# Altium PCB Module_AFE_FPC.PcbDoc
Units mil, origin at the board's own origin, x right, y up, seen from the top; angles counter-clockwise.
Board outline 1200 x 1200 mil, 4 copper layers (Top Layer, Layer 1, Layer 2, Bottom Layer), stack 29.356 mil thick; 18 components, 34 nets, 162 pads, 13 vias.
Unrouted connection lines stored in the file: 2.
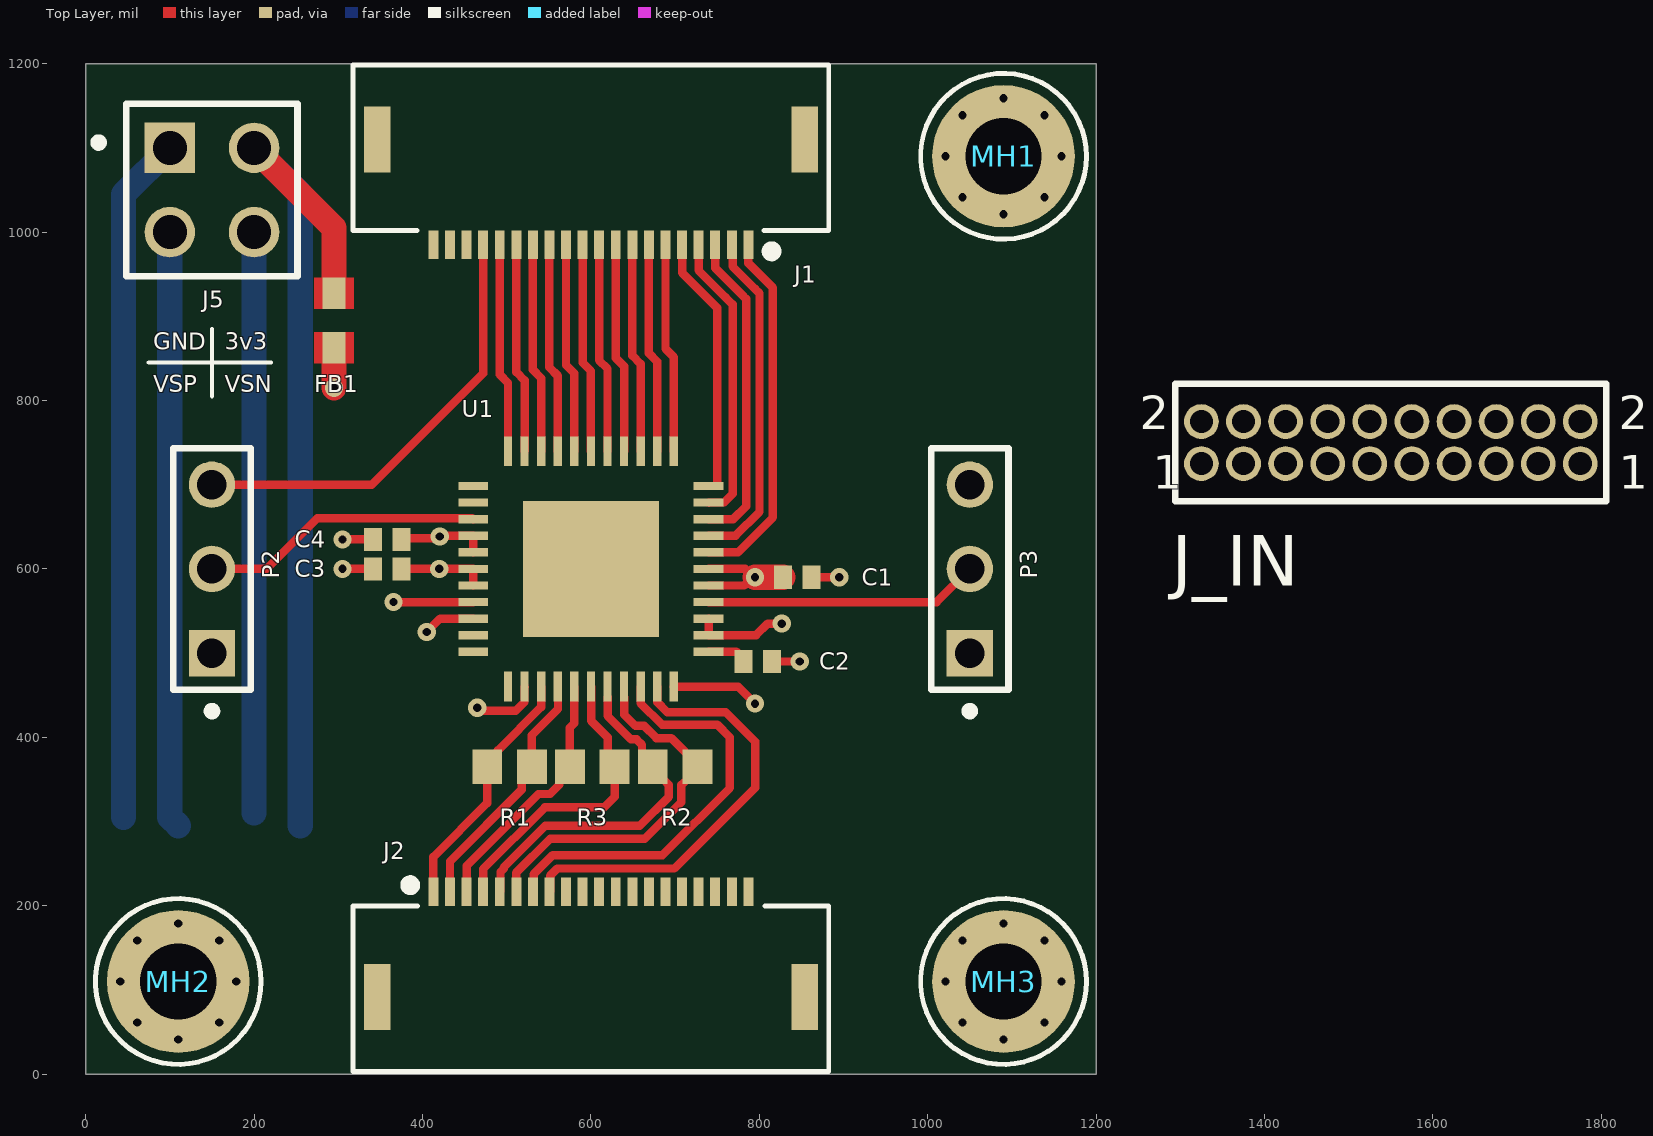
[diagram p0: Top Layer view]
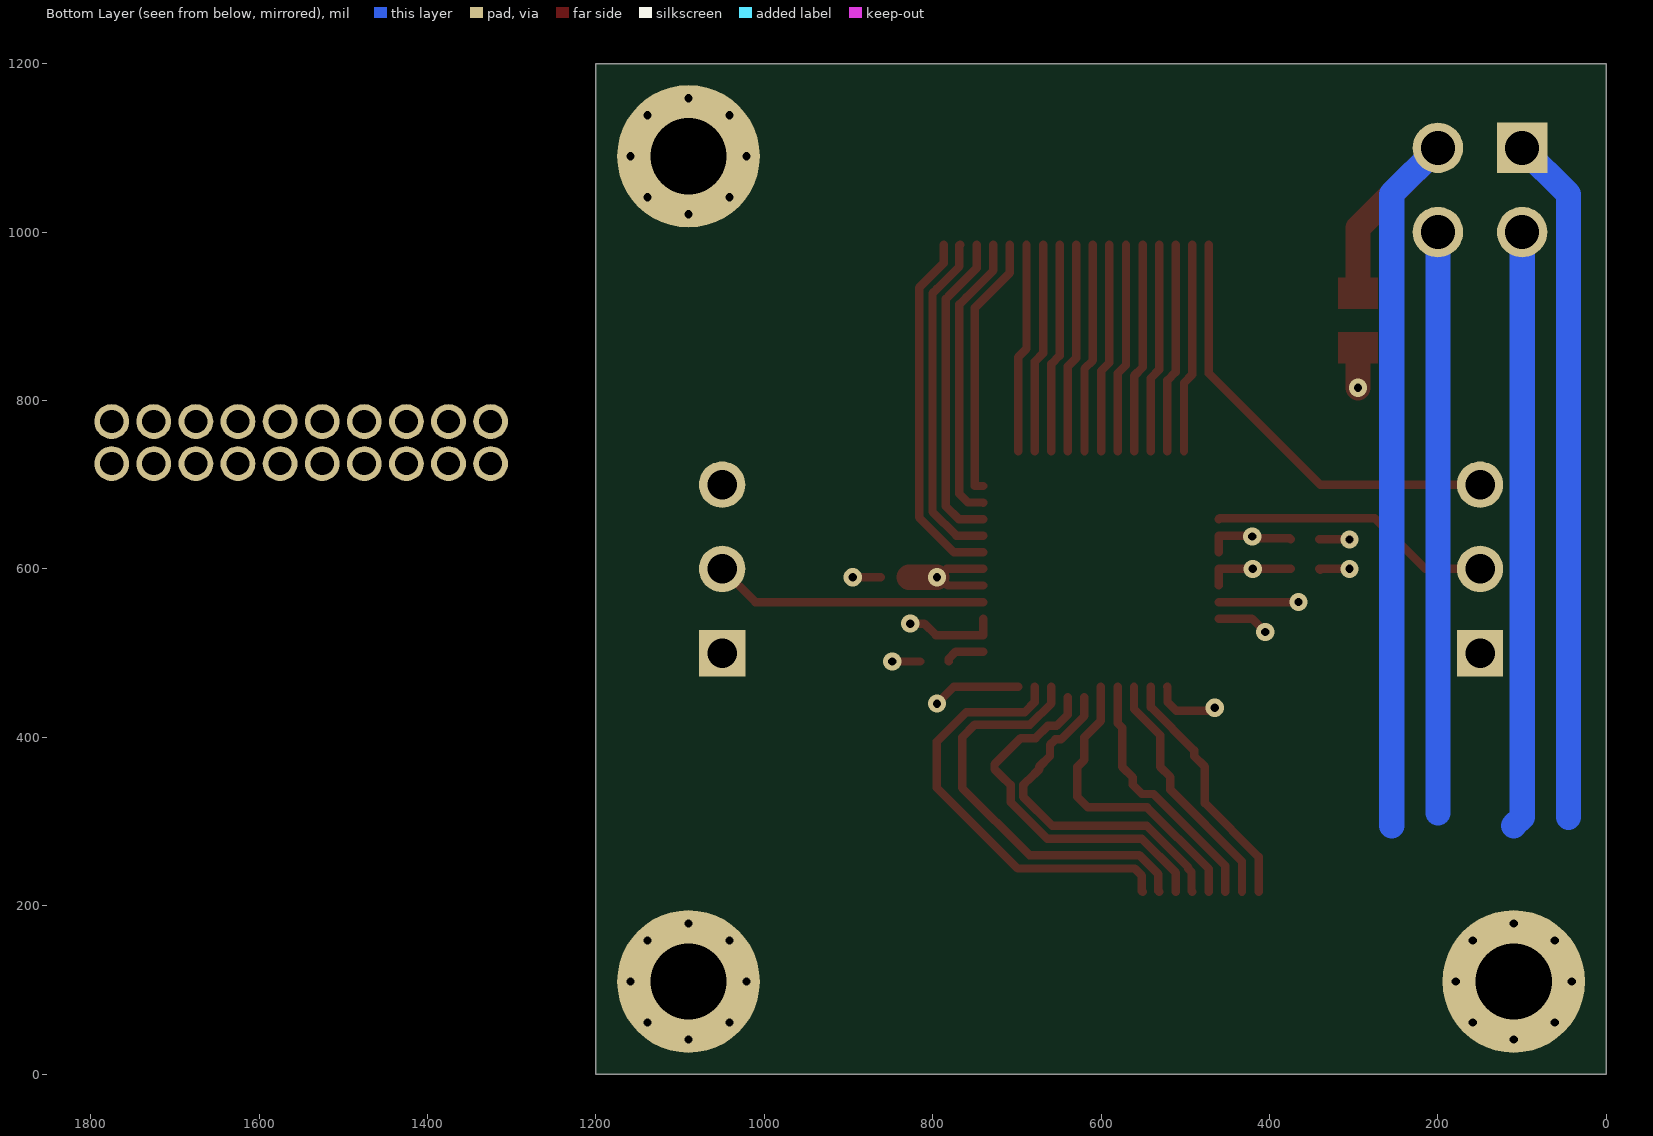
[diagram p1: Bottom Layer view, seen from below]
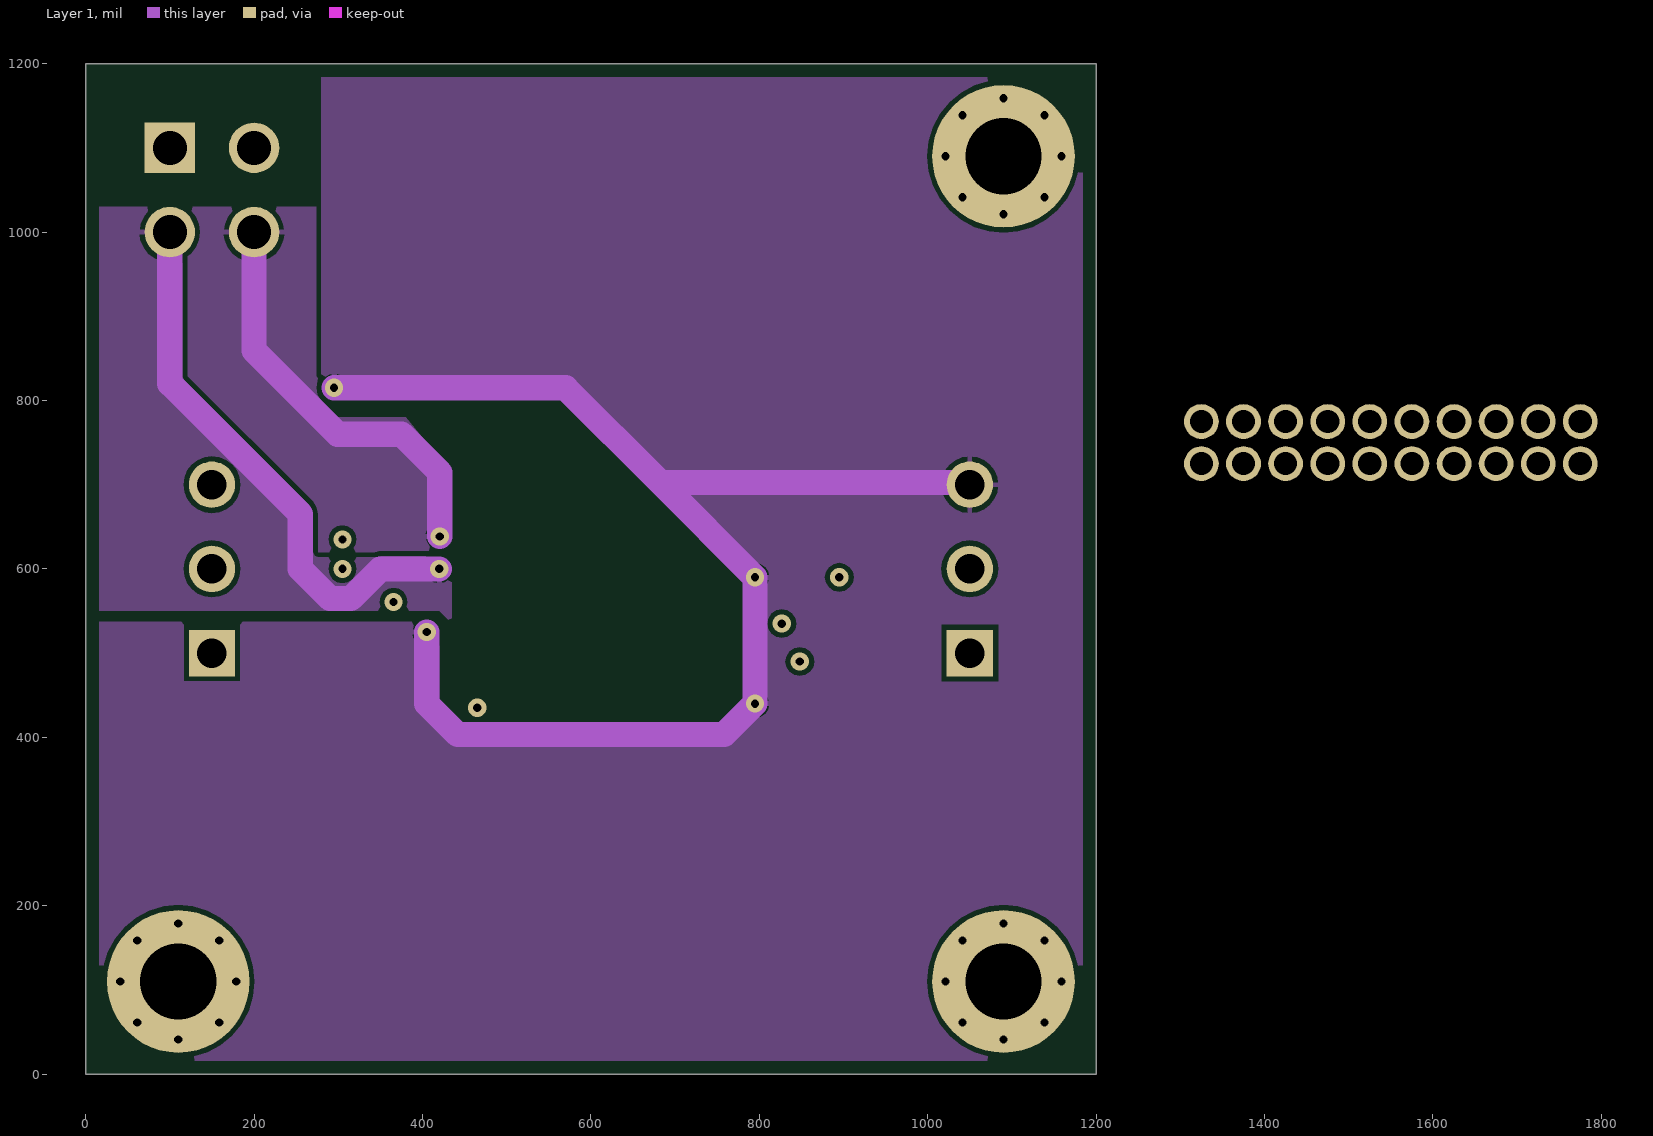
[diagram p2: Layer 1]
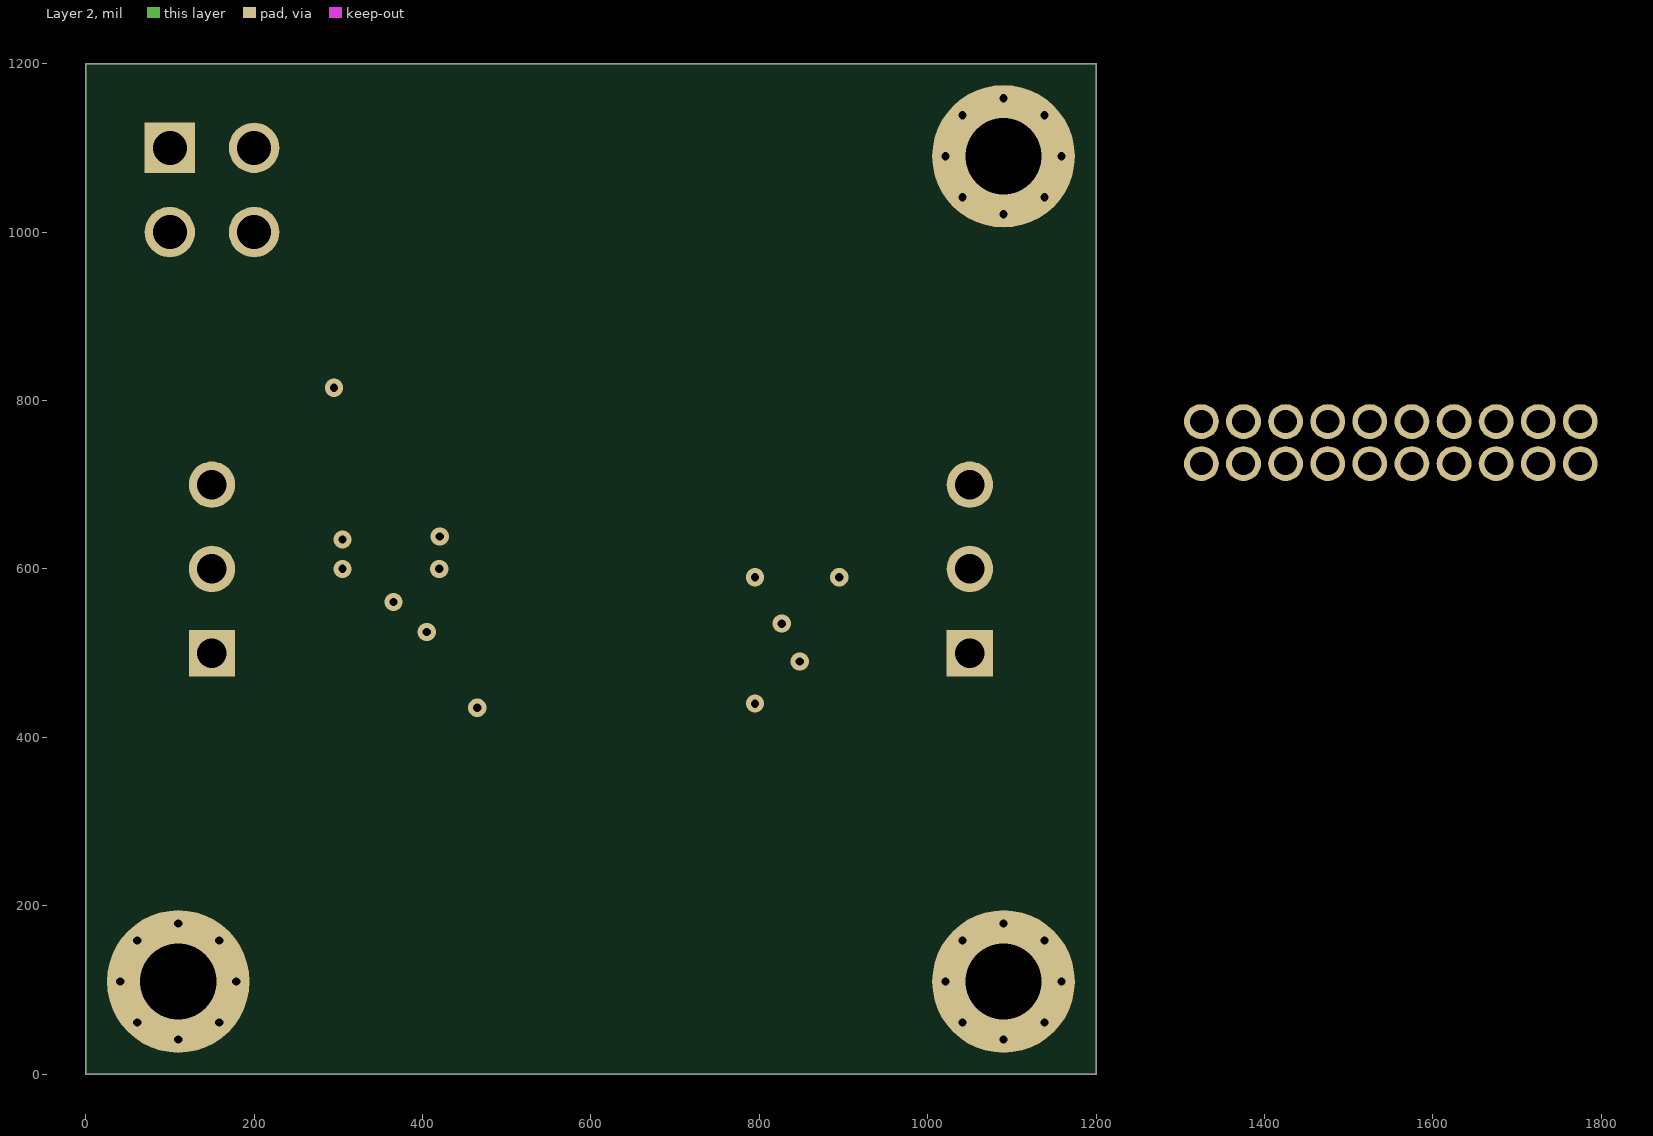
[diagram p3: Layer 2]

## Layer stack, top to bottom
Top Solder: solder mask 0.4, Solder Resist, Dk 3.5
Top Layer: signal copper 1.4
Dielectric 4: prepreg 2.8, PP-006, Dk 4.1
Layer 1: signal copper 1.378
Dielectric 2: prepreg 2.8, PP-006, Dk 4.1
Dielectric 1: dielectric 12.6, FR-4, Dk 4.8
Dielectric 3: prepreg 2.8, PP-006, Dk 4.1
Layer 2: signal copper 1.378
Dielectric 5: prepreg 2.8, PP-006, Dk 4.1
Bottom Layer: signal copper 1.4
Bottom Solder: solder mask 0.4, Solder Resist, Dk 3.5

## Board outline
0,0 1200,0 1200,1200 0,1200

## Design rules (kind name [scope] priority, off if disabled: settings)
BoardOutlineClearance [All] p1: gap=15.75 ignorepadtopadclearanceinfootprint=FALSE
Clearance [All] p1: gap=5.91 ignorepadtopadclearanceinfootprint=TRUE
ComponentClearance [All] p1: gap=5.91 collisioncheckmode=3 verticalgap=5.91 showdistances=FALSE
DiffPairsRouting [All] p1: maxlimit=10 minlimit=5 mostfreqgap=10 toplayer_minwidth=10 toplayer_maxwidth=15 toplayer_prefwidth=15 midlayer1_minwidth=15 midlayer1_maxwidth=15 midlayer1_prefwidth=15 midlayer2_minwidth=15 midlayer2_maxwidth=15 midlayer2_prefwidth=15 bottomlayer_minwidth=10 bottomlayer_maxwidth=15 bottomlayer_prefwidth=15 maxuncoupledlength=500
HoleSize [All] p1: absolutevalues=TRUE maxlimit=15.75 minlimit=9.84 maxpercent=80.000 minpercent=20.000
HoleToHoleClearance [All] p1: gap=17.72 allowstackedmicrovias=TRUE
MinimumAnnularRing [All] p1: minimumring=5.91
MinimumSolderMaskSliver [All] p1: minsoldermaskwidth=5.91
PlaneClearance [All] p1: clearance=5.91
PlaneConnect [All] p1: planeconnectstyle=Relief reliefexpansion=9.84 reliefentries=4 reliefconductorwidth=5.91 reliefairgap=5.91
PolygonConnect [All] p1: connectstyle=Relief reliefconductorwidth=5.91 reliefentries=4 polygonreliefangle="90 Angle" airgapwidth=5.91
RoomDefinition Module_AFE [InComponentClass('Module_AFE')] p1: confinementstyle=ConfineIn formatcopy=TRUE lockcomponents=FALSE outline 1245,-45 2910,-45 2910,645 1245,645
RoomDefinition U_intanRHS2116 [InComponentClass('U_intanRHS2116')] p2 off: confinementstyle=ConfineIn formatcopy=TRUE lockcomponents=FALSE outline 0,0 2000,0 2000,1320 0,1320
RoutingVias [All] p1: holewidth=9.84 width=21.65 viastyle="Through Hole" minholewidth=9.84 minwidth=21.65 maxholewidth=15.75 maxwidth=31.5
SilkToSilkClearance [All] p1: silktosilkclearance=7.87
SilkToSolderMaskClearance [IsPad] p1: minsilkscreentomaskgap=7.87 clearancetoexposedcopper=TRUE
SolderMaskExpansion [All] p1: expansion=5.91 istentingtop=FALSE
Width [All] p1: maxlimit=1968.5 minlimit=5.91 preferedwidth=5.91
21 further rules are at their usual default settings.

## Classes and differential pairs
net class ELEC[0..15]: ELEC0 ELEC1 ELEC2 ELEC3 ELEC4 ELEC5 ELEC6 ELEC7 ELEC8 ELEC9 ELEC10 ELEC11 ELEC12 ELEC13 ELEC14 ELEC15
component class U_intanRHS2116: C1 C2 C3 C4 U1
component class Module_AFE: FB1 J1 J2 J5 J_IN MH1 MH2 MH3 P2 P3 R1 R2 R3
differential pair SCLK1h: +SCLK1h_P -SCLK1h_N
differential pair nCS1h: +nCS1h_P -nCS1h_N
differential pair MOSI1h: +MOSI1h_P -MOSI1h_N
differential pair MISO1h: +MISO1h_P -MISO1h_N

## Components (designator, comment, footprint, x,y, rotation, side; value= is the part's Value field where it differs from the comment)
C1 "capacitor_npol_ame" rcl_0402i_1005m_most 845,590 r180 top value=100nF
C2 "capacitor_npol_ame" rcl_0402i_1005m_most 798.07,490 r180 top value=10nF
C3 "capacitor_npol_ame" rcl_0402i_1005m_most 358.07,600 r0 top value=100nF
C4 "capacitor_npol_ame" rcl_0402i_1005m_most 358.07,635 r0 top value=100nF
FB1 "BLM18PG121SN1D" MURA-BLM18PG_KG-B25-CHIP-2_V1 295,895 r270 top
J1 "FH52-20S-0.5SH" FH52-20S-0.5SH 600,1110 r180 top
J2 "FH52-20S-0.5SH" FH52-20S-0.5SH 600,91.54 r0 top
J5 "HTSW-102-07-G-D" FP-HTSW-102-07-G-D-MFG 150,1050 r270 top
J_IN "62202021121" 62202021121 1550,750 r0 top
MH1 "MH_7.4MMC_3.2MMD" M2X0.4_plated_loose_fit_pan_head 1090,1090 r0 top
MH2 "MH_7.4MMC_3.2MMD" M2X0.4_plated_loose_fit_pan_head 110,110 r0 top
MH3 "MH_7.4MMC_3.2MMD" M2X0.4_plated_loose_fit_pan_head 1090,110 r0 top
P2 "87224-3" TECO-87224-3_V 150,600 r90 top
P3 "87224-3" TECO-87224-3_V 1050,600 r90 top
R1 "CRCW0603100RJNEA" RESC1609X50X30ML10T20 503.43,365 r0 top
R2 "CRCW0603100RJNEA" RESC1609X50X30ML10T20 700,365 r0 top
R3 "CRCW0603100RJNEA" RESC1609X50X30ML10T20 601.57,365 r0 top
U1 "Intan Technologies RHS2116 chip" QFN44_7_X_7 600,600 r0 top

## Footprints (in the part's own frame and the unit in brackets; to place one, negate y for a bottom-side part, rotate by r counter-clockwise, add the part's x,y. Pads: shape width x height; smd on the part's side, far side on the other; paste and mask are expansions set on the pad)
62202021121 [mm] "Pin Header, pitch 1.27 mm, THT, Vertical, dual row, 20p"
  round 1.05 hole 0.7: 1(-5.715,-0.635) 2(-5.715,0.635) 3(-4.445,-0.635) 4(-4.445,0.635) 5(-3.175,-0.635) 6(-3.175,0.635) 7(-1.905,-0.635) 8(-1.905,0.635) 9(-0.635,-0.635) 10(-0.635,0.635) 11(0.635,-0.635) 12(0.635,0.635) 13(1.905,-0.635) 14(1.905,0.635) 15(3.175,-0.635) 16(3.175,0.635) 17(4.445,-0.635) 18(4.445,0.635) 19(5.715,-0.635) 20(5.715,0.635)
  silkscreen extent -6.5,-1.78 6.5,1.78, body extent -6.35,-1.7 6.35,1.7, height 5.33
FH52-20S-0.5SH [mm] "FPC Connector; FH52 Series; 20 Position; 0.5mm pitch; Right Angle"
  rect 0.3x0.85 smd: 1(-4.75,3.175) 2(-4.25,3.175) 3(-3.75,3.175) 4(-3.25,3.175) 5(-2.75,3.175) 6(-2.25,3.175) 7(-1.75,3.175) 8(-1.25,3.175) 9(-0.75,3.175) 10(-0.25,3.175) 11(0.25,3.175) 12(0.75,3.175) 13(1.25,3.175) 14(1.75,3.175) 15(2.25,3.175) 16(2.75,3.175) 17(3.25,3.175) 18(3.75,3.175) 19(4.25,3.175) 20(4.75,3.175)
  rect 0.8x2 smd: MP1(-6.45,0) MP2(6.45,0)
  silkscreen extent -7.17,-2.25 7.17,3.52, body extent -7.15,-2.25 7.15,3.45, height 2
FP-HTSW-102-07-G-D-MFG [mm]
  rect 1.52x1.52 hole 1.02 paste-1000 mask+0: 1(-1.27,-1.27)
  round 1.52 hole 1.02 paste-1000 mask+0: 2(-1.27,1.27) 3(1.27,-1.27) 4(1.27,1.27)
  silkscreen extent -2.6,-3.54 2.6,2.58, body extent -2.7,-2.68 2.7,2.68, height 0.25
M2X0.4_plated_loose_fit_pan_head [mm] "Loose fit, plated land pattern for metric M2 (2mm radius) screw by 0.4mm length screw with pan head direct mounting"
  round 0.55 hole 0.25 mask+0: 1(-1.75,0) 1(-1.237,-1.237) 1(-1.237,1.237) 1(0,-1.75) 1(0,1.75) 1(1.237,-1.237) 1(1.237,1.237) 1(1.75,0)
  round 4.3 hole 2.3: 1(0,0)
  silkscreen extent -2.5,-2.5 2.5,2.5
MURA-BLM18PG_KG-B25-CHIP-2_V1 [mm] "Chip Ferrite Bead, 2-Leads, Body 1.6x0.8mm, Pitch 1.65mm, Flow Soldering, 18um Land Pad Thickness"
  rect 0.95x0.7 smd mask+0: 1(-0.825,0) 2(0.825,0)
  Top Layer region: -1.3,-0.6 -0.35,-0.6 -0.35,0.6 -1.3,0.6
  Top Layer region: 0.35,-0.6 1.3,-0.6 1.3,0.6 0.35,0.6
  body extent -0.87,-0.48 0.88,0.48, height 0.95
QFN44_7_X_7 [mm]
  rect 0.9x0.25 smd: 1(-3.55,2.5) 2(-3.55,2) 3(-3.55,1.5) 4(-3.55,1) 5(-3.55,0.5) 6(-3.55,0) 7(-3.55,-0.5) 8(-3.55,-1) 9(-3.55,-1.5) 10(-3.55,-2) 11(-3.55,-2.5) 23(3.55,-2.5) 24(3.55,-2) 25(3.55,-1.5) 26(3.55,-1) 27(3.55,-0.5) 28(3.55,0) 29(3.55,0.5) 30(3.55,1) 31(3.55,1.5) 32(3.55,2) 33(3.55,2.5)
  rect 0.25x0.9 smd: 12(-2.5,-3.55) 13(-2,-3.55) 14(-1.5,-3.55) 15(-1,-3.55) 16(-0.5,-3.55) 17(0,-3.55) 18(0.5,-3.55) 19(1,-3.55) 20(1.5,-3.55) 21(2,-3.55) 22(2.5,-3.55) 34(2.5,3.55) 35(2,3.55) 36(1.5,3.55) 37(1,3.55) 38(0.5,3.55) 39(0,3.55) 40(-0.5,3.55) 41(-1,3.55) 42(-1.5,3.55) 43(-2,3.55) 44(-2.5,3.55)
  rect 4.1x4.1 smd: CENTER(0,0)
rcl_0402i_1005m_most [mm] "Chip RCL, 0402 Imperial, 1005 Metric, 2-Leads, Body 1.00x0.5mm, IPC Most Land (Low Density)"
  rect 0.54x0.7 smd: 1(-0.43,0) 2(0.43,0)
  body extent -0.5,-0.25 0.5,0.25, height 0.5
RESC1609X50X30ML10T20 [mm] "Chip Resistor, 2-Leads, Body 1.55x0.85mm, IPC Low Density"
  rect 0.9x1.05 smd: 1(-0.675,0) 2(0.675,0)
  body extent -0.82,-0.48 0.82,0.48, height 0.5
TECO-87224-3_V [mm] "THD, 3-Leads, Body 7.21x2.31mm, Pitch 2.54mm"
  rect 1.4x1.4 hole 0.889: 1(-2.54,0)
  round 1.4 hole 0.889: 2(0,0) 3(2.54,0)
  silkscreen extent -4.41,-1.17 3.64,1.17, body extent -3.61,-1.17 3.61,1.17, height 10.36

## Part data
C1 C3 C4: "Capacitor Non-polarized American Symbol", Manufacturer=Yageo, Manuracturer Part Number=CC0402KRX7R8BB104, Package=0402, Supplier Part Number 1=311-2077-1-ND, Voltage Rating=25V, ComponentLink1Description=Datasheet, ComponentLink1URL=http://www.yageo.com/documents/recent/UPY-GPHC_X7R_6.3V-to-50V_18.pdf, Priging 1="1 	0.15000 	$0.15 (CAD)", Stock 1=143,749, Supplier 1=Digikey, Supplier Description 1="CAP CER 0.1UF 25V X7R 0402", Supplier Link 1=https://www.digikey.ca/product-detail/en/yageo/CC0402KRX7R8BB104/311-2077-1-ND/5698948
C2: "Capacitor Non-polarized American Symbol", Case Code=0402, Manufacturer="Murata Electronics North America", Manufacturer Part Number=GRM155R71H103KA88D, Tolerance=10%, Voltage Rating=25V, ComponentLink1Description="Reference Sheet", ComponentLink1URL=https://www.murata.com/~/media/webrenewal/support/library/catalog/products/capacitor/mlcc/c02e.ashx?la=en-us, Pricing 1=Free, Stock 1=8970712, Supplier 1=7PCB/Bittele, Supplier Description 1="CAP CER 0.01uF ±10% 50V X7R 0402", Supplier Link 1=https://parts.7pcb.com/, Supplier Part Number 1=GRM155R71H103KA88D
FB1: library part CMP-0686-00557-6, "Chip Ferrite Bead for Power Lines, 120 Ohm, 2000 mA, -55 to 125 degC, 1.6 x 0.8 x 0.95 mm SMD, Tape and Reel", DC Resistance="0.05 Ohm Max.", Manufacturer=Murata, Operating Temperature Range="-55 to 125 degC", Rated Current="2000 mA", ComponentLink1Description="Manufacturer URL", ComponentLink1URL=http://www.murata.com/, ComponentLink2Description=Datasheet, ComponentLink2URL=http://www.murata.com/products/catalog/pdf/c31e.pdf, ComponentLink3Description="Package Specification", ComponentLink3URL=http://www.murata.com/products/catalog/pdf/c31e.pdf, DatasheetVersion=08/2013, Impedance (at 100 MHz)="120 Ohm +/- 25%", Mounting Technology="Surface Mount", PackageDescription="2-Pin Chip, Body 1.6 x 0.8 mm", PackageReference=BLM18_H950-2, Packing="Tape and Reel", PartNumber=BLM18PG121SN1D
J1 J2: "01X20 Terminal Connector with  2 mount ground pads", Manufacturer=Hirose, Manufacturer PN=FH52-20S-0.5SH
J5: library part CMP-02766-000010-1, "CONN HEADER VERT 4POS 2.54MM", Current Rating=6.3A, Manufacturer=Samtec, Temperature="-55°C to +125°C", Temperature Range High=+125°C, Temperature Range Low=-55°C, Voltage Rating=550V, Automotive=No, Category=Conn, ComponentLink2Description=Datasheet, ComponentLink2URL=http://suddendocs.samtec.com/catalog_english/htsw_th.pdf, Conn Gender=Male, Conn Orientation=Straight, Contact Material=Gold,Nickel, Device Class L1=Connectors, Device Class L2="Headers and Wire Housings", Device Class L3=unset, Digikey Description="CONN HEADER VERT 4POS 2.54MM", Height=8.71mm, Lead Free=Yes, Manufacturer Part Number=HTSW-102-07-G-D, Mouser Description="Conn Unshrouded Header HDR 4 POS 2.54mm Solder ST Thru-Hole Bag", Number Of Contacts=4, Number Of Rows=2, Octopart=https://octopart.com/htsw-102-07-g-d-samtec-10531767, Package=HTSW-102-07-G-D, Pitch=2.54mm, RoHS=TRUE
J_IN: library part CMP-1502-00951-1, "THT Vertical Pin Header WR-PHD, Pitch 1.27 mm, Dual Row, 20 pins", Contact Resistance=20mOhm, Manufacturer="Wurth Elektronik", Operating Temperature=-40to105degC, Rated Current=1A, Withstanding Voltage=500VAC, Working Voltage=100VAC, Datasheet URL=https://katalog.we-online.de/em/datasheet/62202021121.pdf, Gender=Male, Manufacturer URL=http://www.we-online.de, Mounting Technology=THT, Orientation=Vertical, Package Reference=62202021121, Packaging=Box, Part Number=62202021121, Pin Number=20, Pitch=1.27mm, Publisher=WurthElektronik, Row Number=Dual
MH1 MH2 MH3: library part MH_7.4MMC_3.2MMC, "Mounting Hole 7.4mm Diameter, 3.2mm Drill"
P2 P3: library part CMP-2000-05697-1, "Male Header, Pitch 2.54 mm, 1 x 3 Position, Height 10.744 mm, Tail Length 3.175 mm, -65 to 105 degC, RoHS, Bulk", Color=Black, Manufacturer="TE Connectivity", Package Description="Male Header, Pitch 2.54 mm, 1 x 3 Position, Height 10.744 mm, Tail Length 3.175 mm", Standard Package=520, 3D Model=87224-3.pdf, Catalog Drawings="SingleSquareStraightPost /  / SingleSquareStraightPostSide", Category=Connectors,Interconnects, Connector Type=Header,Unshrouded, Contact Finish=Gold, Contact Finish Thickness=15µin(0.38µm), Contact Mating Length="0.318\"(8.08mm)", Contact Type=MalePin, Datasheet URL=http://www.te.com/commerce/DocumentDelivery/DDEController?Action=showdoc&DocId=Customer+Drawing%7F87224%7FL3%7Fpdf%7FEnglish%7FENG_CD_87224_L3.pdf%7F87224-3, Datasheet Version="Rev. L3, 08/2015", Dynamic Catalog=AMPMODUModIISeries, Family=RectangularConnectors-Headers,MalePins, Featured Product=AMPMODUConnectors, Manufacturer URL=http://www.te.com/, Mating Products="147738-2-ND / -CONNRCPT3POSVERTSMDGOLD / 147723-2-ND / -CONNRCPT3POSVERT.100GOLD / 146763-5-ND / -CONNRCPT3POSSGLVERT.100T/H / A32904-ND / -CONNRECEPT3POS.100VERTGOLD / A26922-ND / -CONNHOUSING3POS.100LOCKING / A26415-ND / -CONNRECEPT3POS.100VERTAU / A26964-ND / -CONNHOUSING3POS.100SINGLE / A3012-ND / -CONNHOUSING3POS.100SINGLE", Mounting Technology=ThroughHole, Mounting Type=ThroughHole, Number of Positions=3, Number of Positions Loaded=All, Number Of Rows=1, Other Names="87224-3-ND / A26545", Package Reference=87224-3, Packaging=Bulk, Pitch="0.100\"(2.54mm)", RoHS Information=87224-3StatementofCompliance, Series=AMPMODUModII, Termination=Solder
R1 R2 R3: library part CMP-2000-03827-1, Manufacturer="Vishay Dale", Part Number=CRCW0603100RJNEA
U1: library part RHS2116_QFN, Manufacturer="Intan Technologies", Manufacturer Part Number=RHS2116, ComponentLink1Discription=Datasheet, ComponentLink1URL=http://intantech.com/files/Intan_RHS2116_datasheet.pdf, ComponentLink2Discription="Bare Die", ComponentLink2URL=http://intantech.com/files/RHS2116_die_diagram.pdf, Pricing 1="1-24=325;  25-99=278;  100-249=233;  250-499=188;  500-999=151  (USD)", Supplier 1=Intan, Supplier Link 1=http://intantech.com/products_RHS2000.html, Supplier Part Number 1=RHS2116

## Via types
v1: diameter 21.65, hole 9.84, Top Layer to Bottom Layer, 13 vias

## Nets (pads, with @x,y where several pads share a name; then routed paths per layer and width w, separated by ;. In a path a pad name is that pad's centre, name@x,y a point inside that pad or via, vN(x,y) a via of type N, cw(c..) or ccw(c..) an arc to the next point about the centre after c; other vN are vias at no path point)
3V3: FB1.1 J5.2 | length 1039.7
  Top Layer w30: J5.2 295,1005 FB1.1
  Bottom Layer w30: J5.2 255,1045 255,295
ELEC0: J1.16 U1.44 | length 249.3
  Top Layer w10: J1.16 491.73,830.82 501.57,820.99 U1.44
ELEC1: J1.15 U1.43 | length 249.3
  Top Layer w10: J1.15 511.42,833.63 521.26,823.79 U1.43
ELEC2: J1.14 U1.42 | length 249.3
  Top Layer w10: J1.14 531.1,836.44 540.94,826.6 U1.42
ELEC3: J1.13 U1.41 | length 249.3
  Top Layer w10: J1.13 550.79,839.25 560.63,829.41 U1.41
ELEC4: J1.12 U1.40 | length 249.3
  Top Layer w10: J1.12 570.47,842.06 580.31,832.22 U1.40
ELEC5: J1.11 U1.39 | length 249.3
  Top Layer w10: J1.11 590.16,844.87 600,835.03 U1.39
ELEC6: J1.10 U1.38 | length 249.3
  Top Layer w10: J1.10 609.84,847.68 619.69,837.83 U1.38
ELEC7: J1.9 U1.37 | length 249.3
  Top Layer w10: J1.9 629.53,850.48 639.37,840.64 U1.37
ELEC8: J1.8 U1.36 | length 249.3
  Top Layer w10: J1.8 649.21,853.29 659.06,843.45 U1.36
ELEC9: J1.7 U1.35 | length 249.3
  Top Layer w10: J1.7 668.9,856.1 678.74,846.26 U1.35
ELEC10: J1.6 U1.34 | length 249.3
  Top Layer w10: J1.6 688.58,861.42 698.43,851.57 U1.34
ELEC11: J1.5 U1.33 | length 314
  Top Layer w10: J1.5 708.27,951.73 750,910 750,698.51 749.92,698.43 U1.33
ELEC12: J1.4 U1.32 | length 345.6
  Top Layer w10: J1.4 727.95,954.55 760,922.51 768.38,914.11 768.38,688.99 758.21,678.82 739.84,678.82 U1.32
ELEC13: J1.3 U1.31 | length 376.7
  Top Layer w10: U1.31 769.07,659.06 784.29,674.27 784.29,920.7 779.09,925.89 747.64,957.36 J1.3
ELEC14: J1.2 U1.30 | length 403.1
  Top Layer w10: U1.30 U1.30 771.96,639.45 800.19,667.69 800.19,927.29 795,932.48 768.23,959.26 768.23,984.09 J1.2
ELEC15: J1.1 U1.29 | length 429.4
  Top Layer w10: U1.29 774.69,619.69 816.1,661.1 816.1,933.89 787.01,962.98 J1.1
GND: C1.1 C2.1 C3.1 C4.1 J5.1 MH1.1 MH2.1 MH3.1 P2.1 P3.1 U1.1 U1.2 U1.8 U1.13 U1.24 U1.25 | length 1245.1
  Top Layer w10: v1(305,600) 340,600 340,598.86 C3.1 ; v1(305,635) C4.1 ; v1(365.63,560.63) U1.8 ; v1(465,435) 468.38,431.62 511.01,431.62 521.18,441.79 521.18,460.16 U1.13 ; U1.25 U1.24 796.26,521.26 810,535 v1(826.73,535) ; C2.1 v1(848.07,490) ; C1.1 v1(895,590)
  Bottom Layer w30: 45,305 45,1045 J5.1
LVDS_EN: P3.2 U1.26 | length 326.5
  Top Layer w10: U1.26 1010.63,560.63 P3.2
MISO1h_N: J2.7 U1.20 | length 499.2
  Top Layer w10: J2.7 532.01,217.44 532.01,237.34 554.66,260 685,260 765,340 765,400 750,415 684.4,415 659.14,440.26 U1.20 U1.20
MISO1h_P: J2.8 U1.21 | length 515.2
  Top Layer w10: J2.8 551.69,217.44 551.69,235.82 560.05,244.17 699.17,244.17 795,340 795,395 760,430 690.61,430 678.82,441.79 678.82,460.16 U1.21
MOSI1h_N: J2.5 R2.1 U1.18 | length 414.2
  Top Layer w10: J2.5 492.64,217.44 492.64,240.14 496.29,243.8 496.29,245.33 545.72,294.76 657.93,294.76 692.5,329.33 692.5,343.47 686.64,349.33 686.14,349.33 673.43,362.05 R2.1 660.71,377.72 660.71,391.13 654.24,397.6 647.63,397.6 619.77,425.46 U1.18@619.77,447.52
MOSI1h_P: J2.6 R2.2 U1.19 | length 439
  Top Layer w10: J2.6 511.29,216.66 511.29,239.12 551.93,279.76 664.15,279.76 707.5,323.12 707.5,343.47 713.36,349.33 713.86,349.33 726.57,362.05 726.57,367.95 695.43,399.09 677.81,399.09 663.4,413.51 652.93,413.51 639.77,426.67 639.77,447.52 U1.19@639.45,447.52
nCS1h_N: J2.1 R1.1 U1.14 | length 296.7
  Top Layer w10: J2.1 412.99,257.99 476.85,321.85 R1.1 489.57,377.72 489.57,384.57 540.86,435.86 U1.14 U1.14
nCS1h_P: J2.2 R1.2 U1.15 | length 296.8
  Top Layer w10: J2.2 432.68,252.68 517.7,337.7 517.7,352.7 R1.2 530,402.64 560.94,433.58 U1.15@560.94,460.24
NetC2_2: C2.2 U1.23 | length 48
  Top Layer w10: U1.23 772.72,501.57 781.14,493.15 C2.2
SCLK1h_N: J2.3 R3.1 U1.16 | length 304.8
  Top Layer w10: J2.3 452.36,247.36 537.72,332.72 551.53,332.72 562.28,343.47 562.28,352.28 R3.1 575,411.48 580.31,416.79 U1.16
SCLK1h_P: J2.4 R3.2 U1.17 | length 361.1
  Top Layer w10: J2.4 472.05,243.58 545.27,316.81 615.63,316.81 628.15,329.33 R3.2 620,373.15 620,400 600.31,419.69 U1.17@600.31,460.24
VDD: C1.2 FB1.2 P3.3 U1.9 U1.22 U1.27 U1.28 | length 1981.3
  Top Layer w10: v1(405,525) 420.94,540.94 U1.9 ; U1.22 774.76,460.24 v1(795,440) ; U1.27 782.16,580.31 v1@792.49,590.64 ; U1.28 783.12,600 v1@792.49,590.64 ; v1@792.77,590.92 v1@792.49,590.64 ; v1(795,590) 793.12,590 v1@792.49,590.64
  Top Layer w30: v1(295,815) FB1.2 ; v1(795,590) C1.2
  Layer 1 w30: v1(295,815) 570,815 682.5,702.5 ; v1(405,525) 405,440 441.73,403.27 758.27,403.27 v1(795,440) v1(795,590) 682.5,702.5 ; P3.3 1047.5,702.5 682.5,702.5
VREF: P2.2 U1.3 | length 335.7
  Top Layer w10: P2.2 215,600 275.24,660.24 459.06,660.24 U1.3
VREF_HEADER: J1.17 P2.3 | length 529.7
  Top Layer w10: P2.3 340,700 472.05,832.05 J1.17
VSTIM-: U1.CENTER
VSTIMN: C4.2 J5.4 U1.4 U1.5 | length 1294
  Top Layer w10: C4.2 376.16,636.16 418.21,636.16 v1(420.55,638.51) 421.33,639.29 460.16,639.29 U1.4 U1.5
  Layer 1 w30: J5.4 200,859.22 299.22,760 375,760 420.55,714.45 v1(420.55,638.51)
  Bottom Layer w30: 200,310 J5.4
VSTIMP: C3.2 J5.3 U1.6 U1.7 | length 1472.3
  Top Layer w10: C3.2 v1(420,600) U1.6 U1.7
  Layer 1 w30: J5.3 100,820 255,665 255,600 290.07,564.93 314.93,564.93 350,600 v1(420,600)
  Bottom Layer w30: J5.3 100,305 110,295
pads on no net: J1.18 J1.19 J1.20 J1.MP1 J1.MP2 J2.9 J2.10 J2.11 J2.12 J2.13 J2.14 J2.15 J2.16 J2.17 J2.18 J2.19 J2.20 J2.MP1 J2.MP2 J_IN.1 J_IN.2 J_IN.3 J_IN.4 J_IN.5 J_IN.6 J_IN.7 J_IN.8 J_IN.9 J_IN.10 J_IN.11 J_IN.12 J_IN.13 J_IN.14 J_IN.15 J_IN.16 J_IN.17 J_IN.18 J_IN.19 J_IN.20 U1.10 U1.11 U1.12

## Polygon pours and split planes (outlines as drawn)
GND on Layer 2 "NONET_L03_P002" (solid, shelved, pour order 2): 740,200
GND on Layer 2 "NONET_L03_P001" (solid, shelved, pour order 1): 0,1200 1200,1200 1200,0 0,0
GND on Layer 2 "NONET_L03_P000" (solid, shelved, pour order 0): 0,1200 0,0 1200,0 1200,30 1200,1200
VSTIMP on Layer 1 "VSTIMP_L02_P006" (solid, pour order 6): 100,1030 0,1030 0,550 420,550 435,535 435,620
VSTIMN on Layer 1 "VSTIMN_L02_P005" (solid, pour order 5): 280,1030 280,780 380,780 425,725 435,715 435,620 255,620 255,665 100,820 100,1030
VDD on Layer 1 "VDD_L02_P004" (solid, pour order 4): 420,410 760,410 800,450 795,455 795,590 570,815 280,815 280,1200 1200,1200 1200,0 420,0
VDD on Layer 1 "VDD_L02_P003" (solid, pour order 3): 0,537.29 0,0 420,0 420,537.29

## Silkscreen, mask and mechanical layers (free items; w line width, h text height)
Top Overlay:
  lines w5: 75,845 220,845 ; 150,805 150,885
  text "GND" at 80,860 h20
  text "3v3" at 165,860 h20
  text "VSP" at 80,810 h20
  text "VSN" at 165,810 h20
Mechanical 1:
  the board outline again, w10

## Text inside footprints (layer, text, board x,y; h text height)
FB1: Mechanical 6 "Land Pattern Adapted for Flow Soldering and 18um Land Pad Thickness" at 326.5,959.96 h1.97 r270
J1: Top 3D Body "20" at 404.13,1056.85 h39.37 r180; Top 3D Body "1" at 808.66,1056.85 h39.37 r180
J2: Top 3D Body "1" at 391.34,144.69 h20; Top 3D Body "20" at 795.87,144.69 h20
J_IN: Top Overlay "2" at 1251.57,765.75 h40; Top Overlay "1" at 1267.32,694.88 h40; Top Overlay "20" at 1820.87,765.75 h40; Top Overlay "19" at 1820.87,694.88 h40